# EAGLE board PygmyWEB_Performance_V1p5 (EAGLE 5.11)
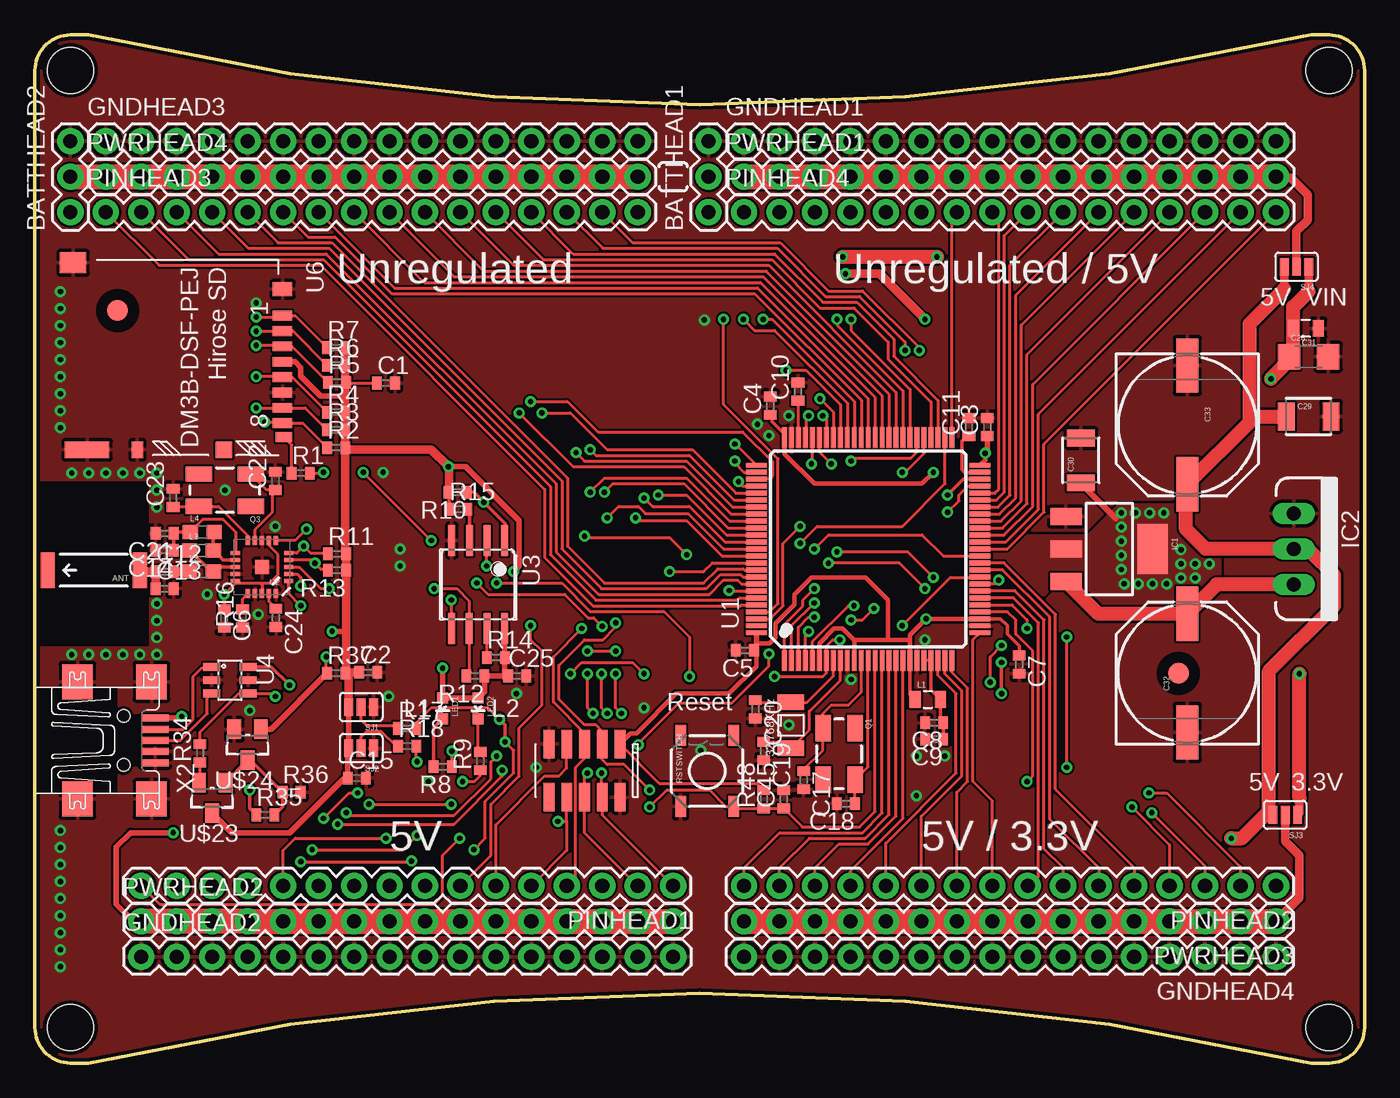
[diagram p0: board, top side]
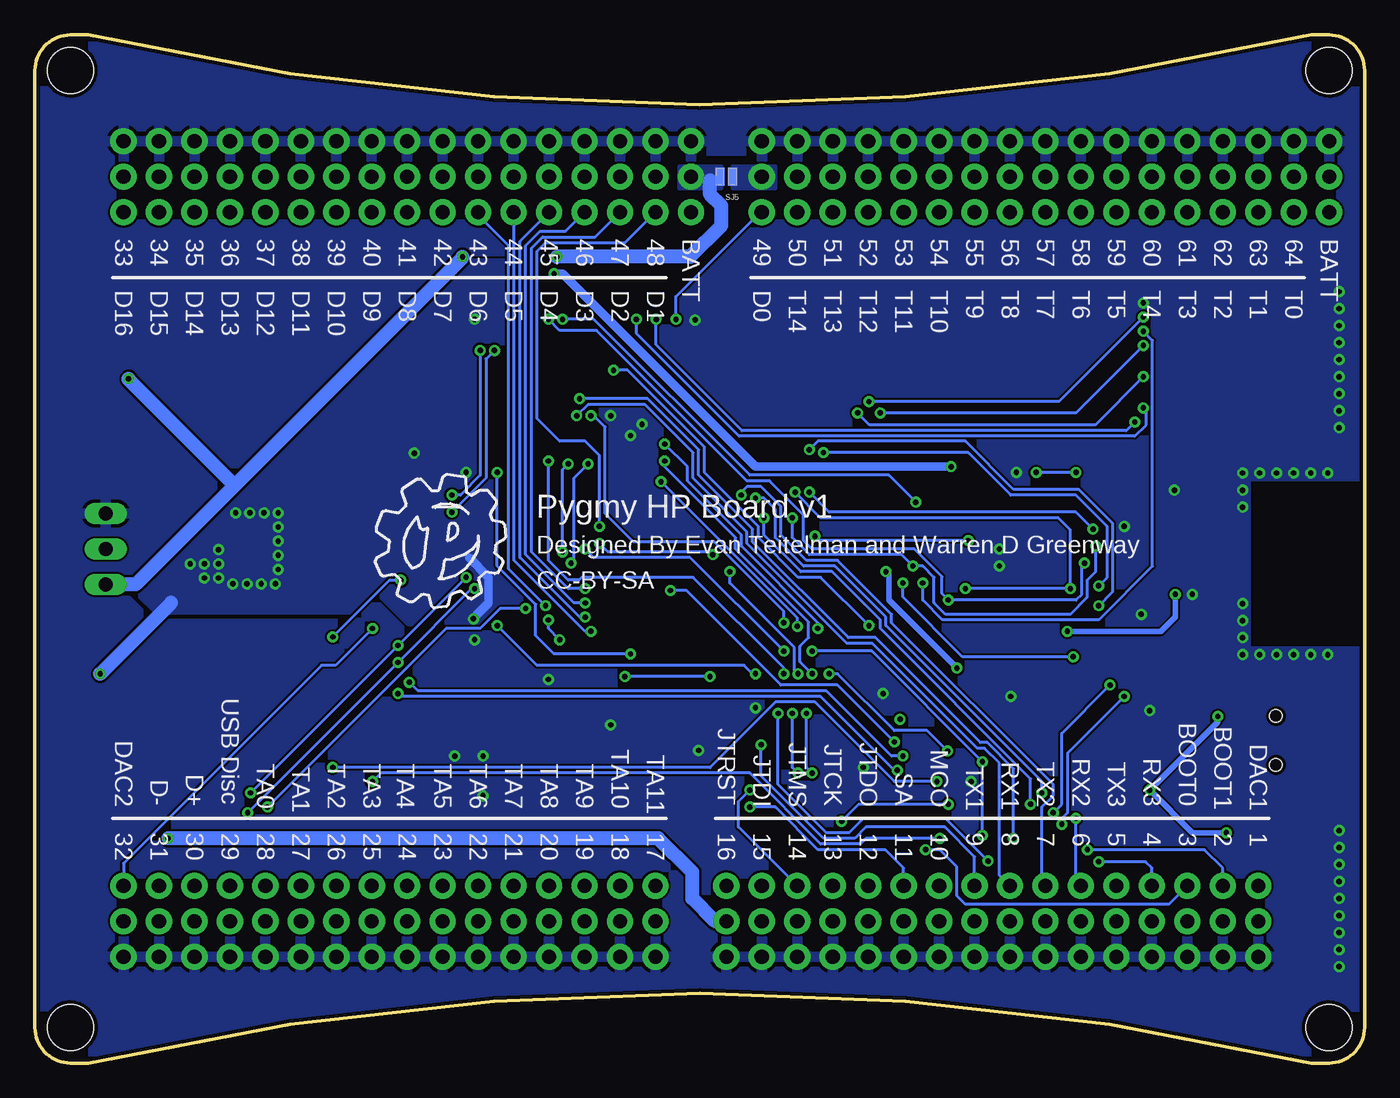
[diagram p1: board, bottom side, seen from below]

Size 95.25 x 73.66 mm. Coordinates in mm from the lower left corner, seen from the top.
Outline: 3.81,73.66 arc26 91.44,73.66 92.71,73.66 arc-90 95.25,71.12 95.25,2.54 arc-90 92.71,0 91.44,0 arc26 3.81,0 2.54,0 arc-90 0,2.54 0,71.12 arc-90 2.54,73.66 3.81,73.66
Copper layers (1*16): Top 0.035mm / dielectric 1.5mm / Bottom 0.035mm
Design rules "Laen (Production) *": minimum track width 6mil, minimum drill 15mil, track to track 6mil, track to pad 6mil, pad to pad 6mil, via to via 6mil, smd to smd 6mil, copper to edge 10mil, drill to drill 6mil, minimum pad ring 10mil, minimum via ring 8mil, stop-mask expansion 4mil, vias tented up to drill 40mil, thermal gap 10mil
tRestrict: area 4.5,52.5 to 7.3,55.3; area 80.5,26.5 to 83.3,29.3; 12 lines
bRestrict: 8 lines

## Footprints (pad centres in the part's own frame; a part is rotated, then mirrored left to right if it is on the bottom)
ANTENNA-CHIP5 = smd 1.016 x 2.54: FEED -3.302,0; NC 3.302,0
1X03 = drill 1.016 pad 1.88 round: 1 0,0; 2 2.54,0; 3 5.08,0
C0402 = smd 0.7 x 0.9: 1 -0.65,0; 2 0.65,0
1206 = smd 1.6 x 1.8: 1 -1.4,0; 2 1.4,0
1210 = smd 1.2 x 2: 1 -1.6,0; 2 1.6,0
0805 = smd 0.8 x 1.2: 1 -0.9,0; 2 0.9,0
PANASONIC_G = smd 3.9 x 1.6: + 4.25,0; - -4.25,0
1X16 = drill 1.016 pad 1.88 round: 1 0,0; 2 2.54,0; 3 5.08,0; 4 7.62,0; 5 10.16,0; 6 12.7,0; 7 15.24,0; 8 17.78,0; 9 20.32,0; 10 22.86,0; 11 25.4,0; 12 27.94,0; 13 30.48,0; 14 33.02,0; 15 35.56,0; 16 38.1,0
SOT223 = smd 1.219 x 2.235: 1 -2.311,-3.099; 2 0,-3.099; 3 2.311,-3.099 | smd 3.6 x 2.2: 4 0,3.099
TO220V = drill 1.016 long: 1 -2.54,0; 2 0,0; 3 2.54,0
FIDUCIAL-1.5X3 = smd 1.5 x 1.5: 1 0,0
0603 = smd 1.1 x 1: 1 -0.85,0; 2 0.85,0
LED-0603 = smd 0.8 x 0.8: A 0,-0.75; C 0,0.75
CRYSTAL-SMD-5X3 = smd 1.9 x 1.1: 1 -1.85,-1.15; 2 1.85,-1.15; 3 1.85,1.15; 4 -1.85,1.15
CM415 = smd 1.1 x 1.9: P$1 0,0; P$2 3.3,0
R0402 = smd 0.7 x 0.9: 1 -0.65,0; 2 0.65,0
TACTILE_SWITCH_SMD = smd 1.524 x 0.762: 1 -2.54,1.905; 2 2.54,1.905; 3 -2.54,-1.905; 4 2.54,-1.905
SJ_3 = smd 0.635 x 1.27: 1 -0.889,0; 2 0,0; 3 0.889,0
SJ_3_PASTE1&2 = smd 0.635 x 1.27: 1 -0.889,0; 2 0,0; 3 0.889,0
SJ_2S-NO = smd 0.635 x 1.27: 1 -0.45,0; 2 0.45,0
TQFP100 = smd 1.5 x 0.35: 1 -8,6; 2 -8,5.5; 3 -8,5; 4 -8,4.5; 5 -8,4; 6 -8,3.5; 7 -8,3; 8 -8,2.5; 9 -8,2; 10 -8,1.5; 11 -8,1; 12 -8,0.5; 13 -8,0; 14 -8,-0.5; 15 -8,-1; 16 -8,-1.5; 17 -8,-2; 18 -8,-2.5; 19 -8,-3; 20 -8,-3.5; 21 -8,-4; 22 -8,-4.5; 23 -8,-5; 24 -8,-5.5; 25 -8,-6; 51 8,-6; 52 8,-5.5; 53 8,-5; 54 8,-4.5; 55 8,-4; 56 8,-3.5; 57 8,-3; 58 8,-2.5; 59 8,-2; 60 8,-1.5; 61 8,-1; 62 8,-0.5; 63 8,0; 64 8,0.5; 65 8,1; 66 8,1.5; 67 8,2; 68 8,2.5; 69 8,3; 70 8,3.5; 71 8,4; 72 8,4.5; 73 8,5; 74 8,5.5; 75 8,6 | smd 0.35 x 1.5: 26 -6,-8; 27 -5.5,-8; 28 -5,-8; 29 -4.5,-8; 30 -4,-8; 31 -3.5,-8; 32 -3,-8; 33 -2.5,-8; 34 -2,-8; 35 -1.5,-8; 36 -1,-8; 37 -0.5,-8; 38 0,-8; 39 0.5,-8; 40 1,-8; 41 1.5,-8; 42 2,-8; 43 2.5,-8; 44 3,-8; 45 3.5,-8; 46 4,-8; 47 4.5,-8; 48 5,-8; 49 5.5,-8; 50 6,-8; 76 6,8; 77 5.5,8; 78 5,8; 79 4.5,8; 80 4,8; 81 3.5,8; 82 3,8; 83 2.5,8; 84 2,8; 85 1.5,8; 86 1,8; 87 0.5,8; 88 0,8; 89 -0.5,8; 90 -1,8; 91 -1.5,8; 92 -2,8; 93 -2.5,8; 94 -3,8; 95 -3.5,8; 96 -4,8; 97 -4.5,8; 98 -5,8; 99 -5.5,8; 100 -6,8
QFN20 = smd 1 x 1: 0 0,0 | smd 0.65 x 0.3: 1 -1.9,1; 2 -1.9,0.5; 3 -1.9,0; 4 -1.9,-0.5; 5 -1.9,-1; 11 1.9,-1; 12 1.9,-0.5; 13 1.9,0; 14 1.9,0.5; 15 1.9,1 | smd 0.3 x 0.65: 6 -1,-1.9; 7 -0.5,-1.9; 8 0,-1.9; 9 0.5,-1.9; 10 1,-1.9; 16 1,1.9; 17 0.5,1.9; 18 0,1.9; 19 -0.5,1.9; 20 -1,1.9
DUBLIB_SOIC8 = smd 0.5 x 2.2: 1 -1.905,-3.154; 2 -0.645,-3.154; 3 0.625,-3.154; 4 1.895,-3.154; 5 1.905,3.154; 6 0.635,3.154; 7 -0.635,3.154; 8 -1.905,3.154
SOT23-6L = smd 0.55 x 1.2: 1 -0.95,-1.3; 2 0,-1.3; 3 0.95,-1.3; 4 0.95,1.3; 5 0,1.3; 6 -0.95,1.3
STM32-JTAG-10P = smd 0.762 x 2.032: P$1 0,0; P$2 0,3.81; P$3 1.27,0; P$4 1.27,3.81; P$5 2.54,0; P$6 2.54,3.81; P$7 3.81,0; P$8 3.81,3.81; P$9 5.08,0; P$10 5.08,3.81
HIROSE-SDCARD-DM3B-DSF-PEJ = smd 0.7 x 1.4: P$1 0,-0.7; P$2 1.1,-0.7; P$3 2.2,-0.7; P$4 3.3,-0.7; P$5 4.4,-0.7; P$6 5.5,-0.7; P$7 6.6,-0.7; P$8 7.7,-0.7 | smd 0.7 x 1.2: P$9 8.7,-0.6 | smd 1.2 x 1.2: P$10 9.6,-4.9 | smd 1.2 x 0.8: P$11 9.6,-11.1 | smd 1.2 x 3.2: P$12 9.6,-14.7 | smd 1.5 x 1.9: P$13 -3.8,-15.7 | smd 1 x 1.4: P$14 -1.9,-0.7
STAND-OFF = hole 3.302: 0,0
SOT23@1 = smd 1 x 1.4: 1 -0.95,-1.1; 2 0.95,-1.1; 3 0,1.1
DUBLIB_UX60-MB-5ST = smd 2 x 0.5: 1 2.25,1.6; 2 2.25,0.8; 3 2.25,0; 4 2.25,-0.8; 5 2.25,-1.6 | smd 2.2 x 2.5: M1 -3.3,-4.2; M2 -3.3,4.2; M3 2,4.2; M4 2,-4.2 | hole 0.9: 0,-1.75; 0,1.75

## Placement (x,y rotation side)
ANT  ANTENNA2SMD5  [ANTENNA-CHIP5]  4.22,35.31 180 top
BATTHEAD1  [1X03]  48.26,60.96 90 top
BATTHEAD2  [1X03]  2.54,60.96 90 top
C1  0.1uF  [C0402]  25.15,48.72 0 top
C2  0.1uF  [C0402]  23.88,27.99 0 top
C3  0.1uF  [C0402]  68.22,45.57 90 top
C4  0.1uF  [C0402]  52.68,47.09 90 top
C5  0.1uF  [C0402]  50.85,29.57 180 top
C6  0.1uF  [C0402]  13.56,31.85 270 top
C7  0.1uF  [C0402]  70.51,28.55 270 top
C8  220pF  [C0402]  64.41,24.38 180 top
C9  0.1uF  [C0402]  64.41,23.22 180 top
C10  2.2uF  [C0402]  54.66,48.11 90 top
C11  2.2uF  [C0402]  66.9,45.57 90 top
C12  1.5pF  [C0402]  9.3,35.2 0 top
C13  1pF  [C0402]  9.3,33.99 0 top
C14  4.7pF  [C0402]  9.3,36.73 180 top
C15  0.1uF  [C0402]  23.06,20.42 0 top
C17  12.5pF  [C0402]  55.07,20.27 270 top
C18  12.5pF  [C0402]  58.09,18.59 180 top
C19  18pF  [C0402]  52.22,22.35 270 top
C20  18pF  [C0402]  51.61,25.35 270 top
C21  0.0022uF  [C0402]  9.3,37.95 180 top
C22  12.5pF  [C0402]  17.22,41.71 90 top
C23  12.5pF  [C0402]  9.91,40.49 90 top
C24  0.033uF  [C0402]  17.27,31.9 270 top
C25  0.1uF  [C0402]  34.54,27.74 0 top
C28  47uF  [1206]  91.24,50.6 0 top
C29  100uF  [1210]  91.24,46.33 0 top
C30  100uF  [1210]  74.93,43.18 90 top
C31  10uF  [0805]  91.03,52.63 180 top
C32  680uF  [PANASONIC_G]  82.55,27.94 90 top
C33  1000uF  [PANASONIC_G]  82.55,45.72 270 top
C45  220pF  [C0402]  53.64,18.9 90 top
CC1  Evan Teitelman  [CC-BY-SA]  -5.08,-12.7 0 top  (outside the outline)
GNDHEAD1  M16PTH  [1X16]  50.8,66.04 0 top
GNDHEAD2  M16PTH  [1X16]  7.62,7.62 0 top
GNDHEAD3  M16PTH  [1X16]  5.08,66.04 0 top
GNDHEAD4  M16PTH  [1X16]  88.9,7.62 180 top
IC1  3.3v  [SOT223]  76.96,36.83 270 top
IC2  AP1084T50L-UTO220  [TO220V]  90.17,36.83 270 top
JP1  FIDUCIAL1.5X3  [FIDUCIAL-1.5X3]  5.92,53.92 0 top
JP2  FIDUCIAL1.5X3  [FIDUCIAL-1.5X3]  81.92,27.92 0 top
L1  10uH  [0805]  63.96,26.06 0 top
L2  3.9nH  [0603]  11.94,35.2 0 top
L3  8.2nH  [0603]  11.94,36.73 0 top
L4  2.7nH  [0603]  11.99,38.05 0 top
LED1  [LED-0603]  29.21,25.4 180 top
LED2  [LED-0603]  31.75,25.4 180 top
PINHEAD1  M16PTH  [1X16]  45.72,12.7 180 top
PINHEAD2  M16PTH  [1X16]  88.9,12.7 180 top
PINHEAD3  M16PTH  [1X16]  5.08,60.96 0 top
PINHEAD4  M16PTH  [1X16]  50.8,60.96 0 top
PWRHEAD1  M16PTH  [1X16]  50.8,63.5 0 top
PWRHEAD2  M16PTH  [1X16]  7.62,10.16 0 top
PWRHEAD3  M16PTH  [1X16]  88.9,10.16 180 top
PWRHEAD4  M16PTH  [1X16]  5.08,63.5 0 top
Q1  8MHz  [CRYSTAL-SMD-5X3]  57.61,22.15 270 top
Q2  CM415  [CM415]  54.15,22.56 90 top
Q3  16MHz  [CRYSTAL-SMD-5X3]  13.61,41.05 180 top
R1  10K  [R0402]  19.05,42.27 0 top
R2  47K  [R0402]  21.59,44.09 0 top
R3  47K  [R0402]  21.59,45.36 0 top
R4  47K  [R0402]  21.59,46.63 0 top
R5  47K  [R0402]  21.64,48.77 0 top
R6  47K  [R0402]  21.59,49.99 0 top
R7  47K  [R0402]  21.59,51.26 0 top
R8  330  [R0402]  29.21,21.23 180 top
R9  330  [R0402]  31.9,21.64 90 top
R10  47K  [R0402]  30.28,40.89 180 top
R11  47K  [R0402]  21.64,36.47 0 top
R12  47K  [R0402]  31.55,27.74 180 top
R13  47K  [R0402]  21.64,35.31 180 top
R14  47K  [R0402]  33.02,29.06 0 top
R15  47K  [R0402]  30.33,39.67 0 top
R16  22K  [R0402]  14.88,31.85 90 top
R17  47K  [R0402]  26.67,23.98 0 top
R18  47K  [R0402]  26.67,22.71 0 top
R34  1.5K  [R0402]  11.84,22.2 90 top
R35  10K  [R0402]  16.51,17.78 0 top
R36  36K  [R0402]  18.39,19.41 0 top
R37  47K  [R0402]  21.59,27.94 0 top
R48  100K  [R0402]  52.22,18.9 90 top
RSTSWITCH  SWITCH-MOMENTARY-2SMD  [TACTILE_SWITCH_SMD]  48.16,20.93 90 top
SJ1  [SJ_3]  23.37,25.5 180 top
SJ2  [SJ_3]  23.37,22.56 180 top
SJ3  [SJ_3_PASTE1&2]  89.56,17.78 180 top
SJ4  [SJ_3_PASTE1&2]  90.37,57.05 180 top
SJ5  SOLDERJUMPERNO  [SJ_2S-NO]  45.72,63.5 180 bottom
U1  STM32F205VG  [TQFP100]  59.69,36.83 90 top
U2  NRF24L01SMD  [QFN20]  16.26,35.53 180 top
U3  SST25VF080B  [DUBLIB_SOIC8]  31.75,34.29 180 top
U4  USBLC6-2  [SOT23-6L]  13.97,27.43 270 top
U5  STM32-JTAG-10P  [STM32-JTAG-10P]  41.91,22.86 180 top
U6  HIROSE-SDCARD-DM3B-DSF-PEJ  [HIROSE-SDCARD-DM3B-DSF-PEJ]  18.44,53.54 270 top
U$10  [STAND-OFF]  2.54,2.54 180 top
U$11  [STAND-OFF]  92.71,2.54 180 top
U$15  [STAND-OFF]  92.71,71.12 0 top
U$16  [STAND-OFF]  2.54,71.12 0 top
U$23  PMBT6428  [SOT23@1]  12.7,19 180 top
U$24  PMBT6428  [SOT23@1]  15.24,22.81 180 top
X2  MINI-USBUX60-MB-5ST  [DUBLIB_UX60-MB-5ST]  6.35,23.11 0 top

## Library data of the parts
ANT GNDHEAD1-GNDHEAD4 L2-L4 LED1 LED2 PINHEAD1-PINHEAD4 PWRHEAD1-PWRHEAD4 Q1-Q3 SJ1-SJ5 U1-U6 X2 = Pygmy
BATTHEAD1 BATTHEAD2 C28-C33 JP1 JP2 L1 RSTSWITCH U$10 U$11 U$15 U$16 = SparkFun
C1-C15 C17-C25 C45 R1-R18 R34-R37 R48 = rcl
CC1 IC1 IC2 = Custom12
U$23 U$24 = dublib

## Nets
3.3V: C1.1 C2.1 C3.1 C4.1 C5.1 C6.1 C7.1 C15.1 C25.1 C30.1 IC1.2 IC1.4 L1.1 LED1.A LED2.A R2.2 R3.2 R4.2 R5.2 R6.2 R7.2 R10.2 R11.2 R12.1 R13.1 R14.2 R15.1 R37.2 R48.2 SJ1.3 SJ2.3 SJ3.1 U1.6 U1.11 U1.19 U1.28 U1.50 U1.75 U1.100 U2.7 U2.15 U2.18 U3.8 U5.P$1 U6.P$4 U$23.3
5V: C29.1 C33.+ IC2.2 PWRHEAD2.1 PWRHEAD2.2 PWRHEAD2.3 PWRHEAD2.4 PWRHEAD2.5 PWRHEAD2.6 PWRHEAD2.7 PWRHEAD2.8 PWRHEAD2.9 PWRHEAD2.10 PWRHEAD2.11 PWRHEAD2.12 PWRHEAD2.13 PWRHEAD2.14 PWRHEAD2.15 PWRHEAD2.16 R35.1 SJ3.3 SJ4.3 X2.1
BOOT0: PINHEAD1.14 R17.2 U1.94
BOOT1: PINHEAD1.15 R18.2 U1.37
COM1_RX: PINHEAD1.9 U1.69
COM1_TX: PINHEAD1.8 U1.55
COM2_RX: PINHEAD1.11 U1.87
COM2_TX: PINHEAD1.10 U1.86
COM3_RX: PINHEAD1.13 U1.56
COM3_TX: PINHEAD1.12 U1.68
D0: PINHEAD3.16 U1.97
D1: PINHEAD4.1 U1.98
D2: PINHEAD4.2 U1.1
D3: PINHEAD4.3 U1.2
D4: PINHEAD4.4 U1.3
D5: PINHEAD4.5 U1.4
D6: PINHEAD4.6 U1.5
D7: PINHEAD4.7 U1.51
D8: PINHEAD4.8 U1.46
D9: PINHEAD4.9 U1.45
D10: PINHEAD4.10 U1.44
D11: PINHEAD4.11 U1.43
D12: PINHEAD4.12 U1.42
D13: PINHEAD4.13 U1.41
D14: PINHEAD4.14 U1.40
D15: PINHEAD4.15 U1.39
D16: PINHEAD4.16 U1.38
DAC1: PINHEAD1.16 U1.29
DAC2: PINHEAD2.1 U1.30
FLASH_CS: R10.1 U1.58 U3.1
GND: BATTHEAD1.3 BATTHEAD2.3 C1.2 C2.2 C3.2 C4.2 C5.2 C6.2 C7.2 C8.2 C9.2 C10.2 C11.2 C13.2 C14.2 C15.2 C17.2 C18.2 C19.2 C20.2 C21.2 C22.2 C23.2 C24.2 C25.2 C28.2 C29.2 C30.2 C31.1 C32.- C33.- C45.2 GNDHEAD1.1 GNDHEAD1.2 GNDHEAD1.3 GNDHEAD1.4 GNDHEAD1.5 GNDHEAD1.6 GNDHEAD1.7 GNDHEAD1.8 GNDHEAD1.9 GNDHEAD1.10 GNDHEAD1.11 GNDHEAD1.12 GNDHEAD1.13 GNDHEAD1.14 GNDHEAD1.15 GNDHEAD1.16 GNDHEAD2.1 GNDHEAD2.2 GNDHEAD2.3 GNDHEAD2.4 GNDHEAD2.5 GNDHEAD2.6 GNDHEAD2.7 GNDHEAD2.8 GNDHEAD2.9 GNDHEAD2.10 GNDHEAD2.11 GNDHEAD2.12 GNDHEAD2.13 GNDHEAD2.14 GNDHEAD2.15 GNDHEAD2.16 GNDHEAD3.1 GNDHEAD3.2 GNDHEAD3.3 GNDHEAD3.4 GNDHEAD3.5 GNDHEAD3.6 GNDHEAD3.7 GNDHEAD3.8 GNDHEAD3.9 GNDHEAD3.10 GNDHEAD3.11 GNDHEAD3.12 GNDHEAD3.13 GNDHEAD3.14 GNDHEAD3.15 GNDHEAD3.16 GNDHEAD4.1 GNDHEAD4.2 GNDHEAD4.3 GNDHEAD4.4 GNDHEAD4.5 GNDHEAD4.6 GNDHEAD4.7 GNDHEAD4.8 GNDHEAD4.9 GNDHEAD4.10 GNDHEAD4.11 GNDHEAD4.12 GNDHEAD4.13 GNDHEAD4.14 GNDHEAD4.15 GNDHEAD4.16 IC1.1 IC2.1 R16.1 R36.2 RSTSWITCH.1 SJ1.1 SJ2.1 U1.10 U1.20 U1.27 U1.74 U2.0 U2.8 U2.14 U2.17 U2.20 U3.4 U4.2 U4.5 U5.P$2 U5.P$9 U6.P$6 U6.P$11 U6.P$12 U6.P$13 U6.P$14 U$24.2 X2.4 X2.5 X2.M1 X2.M2 X2.M3 X2.M4
JTCK: PINHEAD1.4 U1.76 U5.P$5
JTDI: PINHEAD1.2 U1.77 U5.P$6
JTDO: PINHEAD1.5 U1.89 U5.P$8
JTMS: PINHEAD1.3 U1.72 U5.P$3
JTRST: PINHEAD1.1 U1.90 U5.P$4
LED0: R8.1 U1.34
LED1: R9.1 U1.33
MCO: PINHEAD1.7 U1.67
N$1: C17.1 Q1.1 U1.12
N$2: C8.1 C9.1 L1.2 U1.21 U1.22
N$3: C18.1 Q1.3 U1.13
N$4: R35.2 R36.1 U$23.1 U$24.3
N$6: C11.1 U1.49
N$7: C10.1 U1.73
N$8: C20.1 Q2.P$2 U1.8
N$9: C19.1 Q2.P$1 U1.9
N$10: LED1.C R8.2
N$11: R1.1 U6.P$9
N$12: LED2.C R9.2
N$17: C12.2 L2.1
N$18: L3.2 L4.2 U2.12
N$19: ANT.FEED C12.1 C13.1
N$20: L2.2 L3.1 U2.13
N$21: C14.1 C21.1 L4.1 U2.11
N$23: R16.2 U2.16
N$24: C24.1 U2.19
N$25: R34.1 U$23.2
N$26: C22.1 Q3.1 U2.9
N$27: C23.1 Q3.3 U2.10
N$28: R15.2 U3.3
N$29: R14.1 U3.7
N$30: R17.1 SJ1.2
N$31: R18.1 SJ2.2
N$38: U4.1 X2.2
PH1LINE: PWRHEAD1.1 PWRHEAD1.2 PWRHEAD1.3 PWRHEAD1.4 PWRHEAD1.5 PWRHEAD1.6 PWRHEAD1.7 PWRHEAD1.8 PWRHEAD1.9 PWRHEAD1.10 PWRHEAD1.11 PWRHEAD1.12 PWRHEAD1.13 PWRHEAD1.14 PWRHEAD1.15 PWRHEAD1.16 SJ4.2
PH3LINE: PWRHEAD3.1 PWRHEAD3.2 PWRHEAD3.3 PWRHEAD3.4 PWRHEAD3.5 PWRHEAD3.6 PWRHEAD3.7 PWRHEAD3.8 PWRHEAD3.9 PWRHEAD3.10 PWRHEAD3.11 PWRHEAD3.12 PWRHEAD3.13 PWRHEAD3.14 PWRHEAD3.15 PWRHEAD3.16 SJ3.2
PH4LINE: BATTHEAD2.2 PWRHEAD4.1 PWRHEAD4.2 PWRHEAD4.3 PWRHEAD4.4 PWRHEAD4.5 PWRHEAD4.6 PWRHEAD4.7 PWRHEAD4.8 PWRHEAD4.9 PWRHEAD4.10 PWRHEAD4.11 PWRHEAD4.12 PWRHEAD4.13 PWRHEAD4.14 PWRHEAD4.15 PWRHEAD4.16 SJ5.1
RF24_CE: U1.81 U2.1
RF24_CS: U1.82 U2.2
RF24_IRQ: U1.84 U2.6
SA: C45.1 PINHEAD1.6 R48.1 RSTSWITCH.3 U1.14 U5.P$7
SDIO_CK: R4.1 U1.80 U6.P$5
SDIO_CMD: R5.1 U1.83 U6.P$3
SDIO_D0: R3.1 U1.65 U6.P$7
SDIO_D1: R2.1 U1.66 U6.P$8
SDIO_D2: R7.1 U1.78 U6.P$1
SDIO_D3: R6.1 U1.79 U6.P$2
SDIO_DETECT: R1.2 U1.52
SPI_MISO: R11.1 U1.88 U2.5 U3.2
SPI_MOSI: R13.2 U1.57 U2.4 U3.5
SPI_SCK: R12.2 U1.85 U2.3 U3.6
T0: PINHEAD3.1 U1.96
T1: PINHEAD3.2 U1.95
T2: PINHEAD3.3 U1.93
T3: PINHEAD3.4 U1.92
T4: PINHEAD3.5 U1.91
T5: PINHEAD3.6 U1.64
T6: PINHEAD3.7 U1.63
T7: PINHEAD3.8 U1.62
T8: PINHEAD3.9 U1.61
T9: PINHEAD3.10 U1.60
T10: PINHEAD3.11 U1.59
T11: PINHEAD3.12 U1.54
T12: PINHEAD3.13 U1.53
T13: PINHEAD3.14 U1.47
T14: PINHEAD3.15 U1.48
TA0: PINHEAD2.5 U1.36
TA1: PINHEAD2.6 U1.35
TA2: PINHEAD2.7 U1.32
TA3: PINHEAD2.8 U1.31
TA4: PINHEAD2.9 U1.26
TA5: PINHEAD2.10 U1.25
TA6: PINHEAD2.11 U1.24
TA7: PINHEAD2.12 U1.23
TA8: PINHEAD2.13 U1.18
TA9: PINHEAD2.14 U1.17
TA10: PINHEAD2.15 U1.16
TA11: PINHEAD2.16 U1.15
USB_DISC: PINHEAD2.4 R37.1 U1.7 U$24.1
USB_DM: PINHEAD2.2 U1.70 U4.6
USB_DP: PINHEAD2.3 R34.2 U1.71 U4.4
USBP3: U4.3 X2.3
V+: BATTHEAD1.2 C28.1 C31.2 C32.+ IC1.3 IC2.3 SJ4.1 SJ5.2

## Tracks (layer width: path | path; a pad name or v marks a point on that pad's centre or on a via)
3.3V  (via drill 0.38)
  Top 0.203: 58.67,30.33 58.69,30.31 | C6.1 v13.56,33.58 14.38,34.39 | U2.7 16.77,37.08 17.42,36.42 17.42,35 16.81,34.39 16.41,34.39 | U2.18 16.27,34.25 16.41,34.39 | U5.P$1 44.71,20.06 51.71,20.06 R48.2 | C1.1 22.34,48.72 R5.2 | R11.2 22.34,36.42 | C5.1 51.5,29.94 51.69,30.12 | R14.2 33.67,29.09 33.66,29.11 | 29.68,40.89 R10.2 | 22.3,43.94 22.3,44.03 R2.2 | 14.38,34.39 16.41,34.39 | 14.38,34.39 14.38,34.52 U2.15
  Top 0.254: U1.75 53.69,45.07 52.78,45.97 52.78,46.54 C4.1 | U1.19 62.69,26.43 L1.1 | 29.68,40.84 R15.1 | C7.1 70.51,29.87 69.65,30.73 69.65,31.34 69.16,31.83 U1.28
  Top 0.305: IC1.2 73.71,36.83
  Top 0.33: 62.69,30.33 62.69,30.69 v63.83,31.83 U1.28 | 62.69,30.33 U1.19 | U1.75 53.69,43.64 55.83,41.5 63.55,41.5 v64.36,42.32 | 51.69,29.92 51.69,28.42 49.73,26.47 45.92,26.47 43.08,23.62 42.67,23.62 U5.P$1 | 51.69,30.12 51.69,30.1 51.72,30.07 52.63,30.07 53.04,30.48 53.04,31.5 54.41,32.87 54.41,33.58 55.63,34.8 59.49,34.8 61.11,33.17 61.11,30.33 | 51.69,30.61 U1.100 | 58.69,30.31 U1.11 | U1.6 56.19,30.08 57.25,31.14 57.86,31.14 58.67,30.33 61.11,30.33 | 61.11,30.33 62.69,30.33 | U1.50 68.07,43.21 v68.07,43.69
  Top 0.406: U$23.3 14.09,16.51 18.24,16.51 22.1,20.37 22.36,20.37 C15.1 22.41,22.49 SJ2.3 SJ1.3 | v29.62,42.72 29.68,42.72 30.84,42.72 34.7,38.86 34.7,35.61 v34.29,35.2 | 33.66,31.93 U3.8 33.66,29.11 33.66,27.71 33.63,27.74 R12.1 32.2,26.6 LED2.A LED1.A v29.21,28.3 | 22.29,30.94 v21.28,30.94 | U6.P$4 18.64,50.24 19.05,49.84 19.05,49.23 20.47,47.8 22.24,47.8 | 51.69,29.92 51.69,30.1 51.69,30.61 | C30.1 74.93,41.5 77.42,39.01 | v68.07,43.69 68.22,43.84 C3.1
  Top 0.61: v58.06,56.54 60.5,56.54 v63.75,53.29 | 33.63,27.74 C25.1 | R10.2 29.63,41.11 | 22.29,27.99 22.29,30.94 R13.1 R11.2 22.24,36.52 R2.2 R3.2 R4.2 22.24,47.8 R6.2 | R6.2 R7.2 | R6.2 22.24,48.82 R5.2 | 29.68,40.84 29.68,40.89 29.68,42.72 29.68,42.78 | v29.62,42.72 28.4,43.94 22.3,43.94 | 22.29,27.99 C2.1 | 22.29,27.99 R37.2 22.48,27.7 SJ1.3 | SJ3.1 90.58,17.91 90.58,19
  Top 1.016: 90.58,19 v90.58,27.89
  Bottom 0.406: v34.29,35.2 34.09,35 34.09,33.17 v29.21,28.3 | v13.56,33.58 13.56,31.95 14.58,30.94 v21.28,30.94
  Bottom 0.61: v63.83,31.83 63.83,31.87 62.74,32.97 62.74,34.8 64.16,36.22 | v29.62,42.72 43.64,42.72 57.45,56.54 v58.06,56.54
  Bottom 1.016: v90.58,27.89 85.5,32.97
  other vias: 77.83,37.39 77.83,36.37 77.83,38.4 77.83,39.42 77.83,35.36 78.84,39.42 80.87,39.42 79.86,39.42 78.03,34.34 80.06,34.34 81.08,34.34 82.09,36.78 82.09,35.76 83.11,35.76 84.12,35.76 82.09,34.75 83.11,34.75 79.04,34.34
  pour Bottom: 71.93,33.12 72.75,32.31 86.56,32.31 87.99,33.73 68.48,52.83 64.01,57.51 61.57,57.51 61.77,43.28 61.77,34.75 59.74,32.72 59.74,31.5 68.48,31.5 70.92,33.93
  pour Top (no thermals): 81.69,40.03 77.62,40.03 75.39,37.8 68.68,37.8 68.68,33.53 72.34,33.53 72.95,34.14 74.98,34.14 76.4,32.72 81.69,32.72 81.69,33.73 83.92,33.73 84.94,34.75 84.94,36.37 83.52,36.37 81.89,38 81.89,39.83
5V  (via drill 0.38)
  Top 0.254: R35.1 15.39,18.25 v15.39,19.56
  Top 0.406: 7.06,10.16 5.84,11.38 5.84,15.49 6.86,16.51 v9.91,16.51 | X2.1 10.39,24.71 v10.52,24.84
  Top 0.61: 91.39,36.63 90.37,36.63 IC2.2 | 82.45,40.1 82.45,41.37 C33.+ | 88.39,18.03 88.49,18.03 88.67,17.86 SJ3.3 | 89.48,55.45 SJ4.3
  Top 0.62: 7.06,10.16 PWRHEAD2.4
  Top 1.016: IC2.2 83.87,36.83 82.45,38.25 82.45,40.1 | C33.+ 87.01,45.93 | 91.39,36.63 93.07,34.95 93.07,32.77 88.39,28.09 88.39,18.03 86.46,16.1 v85.7,16.1 | 89.48,55.45 87.01,52.97 87.01,45.93 | 87.01,45.93 87.41,46.33 C29.1
  Top 1.778: PWRHEAD2.16 PWRHEAD2.15 PWRHEAD2.14 PWRHEAD2.13 PWRHEAD2.12 PWRHEAD2.11 PWRHEAD2.10 PWRHEAD2.9 PWRHEAD2.8 PWRHEAD2.7 PWRHEAD2.6 PWRHEAD2.5 PWRHEAD2.4 PWRHEAD2.3 PWRHEAD2.2 PWRHEAD2.1
  Bottom 0.406: v10.52,24.84 10.52,24.44 v15.39,19.56 12.34,16.51 v9.91,16.51
  Bottom 1.016: v85.7,16.1 50.6,16.1 48.16,13.67 48.16,11.79 46.53,10.16 PWRHEAD2.16
BOOT0  (via drill 0.38)
  Top 0.203: U1.94 49.78,33.83 49.75,33.86 v49.73,33.86 | v33.27,24.64 32.46,25.45 28.39,25.45 27.32,24.38 R17.2 | v33.68,23.01 34.29,22.4 34.29,20.78 32.26,18.74 32.26,16.1 v31.45,15.29
  Top 0.254: v33.68,23.01 33.68,24.23 v33.27,24.64
  Bottom 0.203: PINHEAD1.14 14.02,11.38 28.6,11.38 29.21,11.99 29.21,14.07 30.43,15.29 v31.45,15.29 | v33.68,23.01 37.74,27.08 41.81,27.08 48.59,33.86 v49.73,33.86
BOOT1  (via drill 0.38)
  Top 0.203: U1.37 65.07,36.33 63.55,37.85 56.84,37.85 v55.83,36.83 | v39.57,29.52 v41.61,29.52 | v19.86,15.29 26.37,15.29 v27.38,16.31 | v27.38,21.59 27.32,21.65 R18.2
  Bottom 0.203: v41.61,29.52 48.31,36.22 55.22,36.22 v55.83,36.83 | v27.38,16.31 v27.38,21.59 35.31,29.52 v39.57,29.52 | v19.86,15.29 11.48,15.29 10.16,13.97 PINHEAD1.15
COM1_RX  (via drill 0.38)
  Top 0.203: U1.69 56.69,46.13 v56.44,46.38
  Bottom 0.203: PINHEAD1.9 26.16,13.46 26.16,21.49 27.23,22.55 27.74,22.55 35.26,30.07 37.08,30.07 44.25,37.24 44.25,38.05 48.11,41.91 48.11,43.74 51.56,47.19 55.63,47.19 v56.44,46.38
COM1_TX  (via drill 0.38)
  Top 0.203: v62.13,42.32 62.33,42.32 63.69,43.68 U1.55 | v43.23,22.81 43.23,22.91 46.13,25.81 49.94,25.81 52.58,28.45 v52.58,29.31
  Bottom 0.203: v52.58,29.31 58.06,29.31 59.39,30.63 59.39,32.87 62.13,35.61 v62.13,42.32 | v43.23,22.81 43.23,20.57 38.76,16.1 36.52,16.1 35.71,16.92 30.07,16.92 27.94,14.78 PINHEAD1.8 27.94,13.51
COM2_RX  (via drill 0.38)
  Top 0.203: v23.11,19.35 22.5,19.35 v20.68,17.53 | U1.87 49.44,37.33 46.89,39.88 44.25,39.88 v43.64,40.49
  Bottom 0.203: PINHEAD1.11 20.68,13.06 v20.68,17.53 | v43.64,40.49 43.03,40.49 42.22,39.68 42.22,37.64 40.18,35.61 37.95,35.61 34.29,31.95 34.29,31.34 23.11,20.17 v23.11,19.35
COM2_TX  (via drill 0.38)
  Top 0.203: U1.86 49.55,37.83 46.69,40.69 v44.65,40.69
  Bottom 0.203: PINHEAD1.10 22.96,12.8 23.11,12.8 23.11,18.34 22.3,19.15 22.3,19.96 33.88,31.55 33.88,32.16 37.74,36.02 39.98,36.02 41.81,37.85 41.81,39.88 43.23,41.3 44.25,41.3 44.65,40.89 v44.65,40.69
COM3_RX  (via drill 0.38)
  Top 0.203: U1.56 63.19,43.78 62.74,43.33 58.67,43.33 v58.47,43.13 | v41.61,27.89 41.61,25.45 v42.01,25.04 | v26.98,14.48 26.92,14.43 v19.05,14.43
  Bottom 0.203: v58.47,43.13 58.47,36.02 57.05,34.59 56.29,34.59 56.08,34.8 48.11,34.8 41.61,28.3 v41.61,27.89 | v42.01,25.04 42.01,19.96 38.56,16.51 36.93,16.51 35.92,17.53 30.02,17.53 v26.98,14.48 | PINHEAD1.13 15.24,13.97 15.7,14.43 v19.05,14.43
COM3_TX  (via drill 0.38)
  Top 0.203: U1.68 57.19,46.65 v56.24,47.6 | PINHEAD1.12 17.78,13.36 | PINHEAD1.12 17.78,13.56 | PINHEAD1.12 17.78,15.24 18.64,16.1 v25.15,16.1
  Bottom 0.203: v56.24,47.6 51.36,47.6 47.7,43.94 47.7,42.11 43.84,38.25 43.84,37.34 36.98,30.48 35.05,30.48 27.53,22.96 27.03,22.96 25.15,21.08 v25.15,16.1
D0  (via drill 0.38)
  Top 0.203: v49.33,53.29 49.33,47.19 53.24,43.28 53.24,32.92 52.63,32.31 51.71,32.31 U1.97
  Bottom 0.203: v49.33,53.29 49.33,54.91 43.28,60.96 PINHEAD3.16
D1  (via drill 0.38)
  Top 0.203: U1.98 52.66,31.83 53.59,32.77 53.59,37.24 v54.81,38.46
  Bottom 0.203: v54.81,38.46 54.81,43.54 55.83,44.55 57.66,44.55 59.28,46.18 59.28,58.17 58.67,58.78 52.98,58.78 PINHEAD4.1
D2  (via drill 0.38)
  Top 0.203: v55.83,33.98 55.02,33.17 55.02,32.77 53.69,31.44 U1.1
  Bottom 0.203: v55.83,33.98 57.05,33.98 59.69,36.63 59.69,58.37 58.88,59.18 55.12,59.18 PINHEAD4.2
D3  (via drill 0.38)
  Top 0.203: U1.2 54.19,29.7 54.2,29.72 54.2,31.34 v55.83,32.97
  Bottom 0.203: v55.83,32.97 56.64,32.97 60.1,36.42 60.1,58.57 59.08,59.59 57.25,59.59 PINHEAD4.3
D4  (via drill 0.38)
  Top 0.203: U1.3 54.69,31.22 55.42,31.95 v55.83,31.95
  Bottom 0.203: PINHEAD4.4 60.5,58.88 60.5,36.22 56.24,31.95 v55.83,31.95
D5  (via drill 0.38)
  Top 0.203: U1.4 55.19,30.7 v55.42,30.94
  Bottom 0.203: v55.42,30.94 55.83,30.94 60.91,36.02 60.91,60.91
  Bottom 0.254: 60.91,60.91 PINHEAD4.5
D6  (via drill 0.38)
  Top 0.203: U1.5 55.69,30.19 58.27,32.77 v58.67,32.77
  Bottom 0.203: PINHEAD4.6 63.5,60.76 61.32,58.57 61.32,35.41 v58.67,32.77
D7
  Top 0.203: U1.51 65.69,60.61 PINHEAD4.7
D8
  Top 0.203: U1.46 68.77,40.83 69.04,41.1 69.04,60.5 PINHEAD4.8
D9
  Top 0.203: U1.45 68.88,40.33 69.44,40.89 69.44,59.28 PINHEAD4.9
D10
  Top 0.203: U1.44 68.99,39.83 69.85,40.69 69.85,57.15 PINHEAD4.10
D11
  Top 0.203: U1.43 69.1,39.33 70.26,40.49 70.26,55.02 PINHEAD4.11
D12
  Top 0.203: U1.42 69.21,38.83 70.66,40.28 70.66,52.88 PINHEAD4.12
D13
  Top 0.203: U1.41 69.32,38.33 71.07,40.08 71.07,50.75 PINHEAD4.13
D14
  Top 0.203: U1.40 69.43,37.83 71.48,39.88 71.48,48.62 PINHEAD4.14
D15
  Top 0.203: U1.39 69.54,37.33 71.88,39.68 71.88,46.48 PINHEAD4.15
D16
  Top 0.203: U1.38 69.65,36.83 72.29,39.47 72.29,44.35 PINHEAD4.16
DAC1  (via drill 0.38)
  Top 0.203: U1.29 69.68,32.33 70.26,31.75 70.26,30.73 71.48,29.52 71.48,20.57 v71.07,20.17 | v30.43,16.1 29.21,14.88 29.21,11.99 28.6,11.38 8.94,11.38 PINHEAD1.16
  Bottom 0.203: v30.43,16.1 35.71,16.1 36.12,15.7 38.96,15.7 44.04,20.78 70.46,20.78 v71.07,20.17
DAC2  (via drill 0.38)
  Top 0.203: U1.30 69.99,32.83 71.07,31.75 v71.07,31.14
  Bottom 0.203: v71.07,31.14 73.71,28.5 74.73,28.5 88.9,14.33 PINHEAD2.1 88.9,13.06
FLASH_CS  (via drill 0.38)
  Top 0.203: U1.58 62.19,48.15 57.45,52.88 v57.45,53.29
  Top 0.254: R10.1 31.45,40.89 v32.16,40.18 33.68,38.66 33.68,37.47 U3.1
  Bottom 0.203: v57.45,53.29 55.22,53.29 44.04,42.11 34.09,42.11 v32.16,40.18
GND  (via drill 0.38)
  other vias: 43.64,25.45 17.22,38.46 3.86,29.26 63.14,19.15 15.39,25.25 25.35,26.26 34.49,26.47 28.19,20.17 54,46.38 35.92,21.18 24.94,42.32 26.16,36.83 52.58,44.96 8.74,41.05 1.83,54.05 1.83,55.27 1.83,52.83 26.16,35.61 7.52,42.27 5.08,29.26 15.85,54.46 8.74,42.27 8.74,39.83 7.52,29.26 8.74,31.7 6.3,29.26 8.74,30.48 8.74,29.26 5.08,42.27 3.86,42.27 2.64,42.27 6.3,42.27 63.14,22 65.18,22 58.47,27.48 63.75,30.33 1.83,14.22 1.83,11.79 1.83,10.57 1.83,9.35 1.83,8.13 1.83,6.91 12.34,33.58 16,32.16 51.77,45.77 13.61,41.05 1.83,13 1.83,15.44 1.83,16.66 2.64,29.26 1.83,50.39 1.83,51.61 1.83,49.17 1.83,46.74 1.83,47.96 1.83,45.52 8.74,32.92 47.96,53.24 54,24.23 47.7,22.4
  pour Bottom: -5.08,78.74 100.33,78.74 100.53,-4.88 -5.08,-5.08
  pour Top: -2.54,76.2 97.79,76.2 97.79,-2.54 -2.54,-2.54
JTCK  (via drill 0.38)
  Top 0.203: v50.14,44.35 50.17,44.35 U1.76 | 39.37,23.62 37.14,25.86 37.14,29.11 v39.17,31.14 | PINHEAD1.4 38.73,13.33 38.73,21.18 39.37,21.82 U5.P$5
  Top 0.254: U5.P$5 39.37,23.62
  Bottom 0.203: v50.14,44.35 48.51,42.72 48.51,41.71 44.65,37.85 44.65,37.03 39.17,31.55 v39.17,31.14
JTDI  (via drill 0.38)
  Top 0.203: 51.68,42.32 U1.77 51,42.33 | v39.57,27.89 39.57,25.45 v39.98,25.04 | v39.57,20.78 39.37,20.57 U5.P$6 39.37,16.51 PINHEAD1.2 | v50.14,43.13 50.14,42.98 50.8,42.32 50.99,42.32 51,42.33 | 51,42.33 50.97,42.33
  Bottom 0.203: v39.98,25.04 39.98,21.18 v39.57,20.78 | v50.14,43.13 50.14,42.72 45.06,37.64 45.06,36.83 39.83,31.6 39.83,30.48 40.44,29.87 40.44,28.75 v39.57,27.89
JTDO  (via drill 0.38)
  Top 0.203: 38.1,17.32 U5.P$8 | v23.93,18.54 v29.82,18.54 | U1.89 49.22,36.33 46.69,38.86 43.23,38.86 v43.03,39.07 | v37.47,17.32 38.1,17.32 | 38.1,17.32 38.1,15.24 PINHEAD1.5
  Bottom 0.203: v43.03,39.07 43.03,37.85 40.39,35.2 38.15,35.2 34.7,31.75 34.7,31.14 23.93,20.37 v23.93,18.54 | 37.54,17.32 v37.47,17.32 36.25,18.54 v29.82,18.54
JTMS  (via drill 0.38)
  Top 0.203: v44.04,19.56 42.22,21.39 41,21.39 40.64,21.74 U5.P$3 40.64,23.77 40.18,24.23 39.37,24.23 37.54,26.06 37.54,28.5 39.37,30.33 40.69,30.33 41.61,31.24 v41.61,31.55 | 55.22,44.86 55.22,46.18 v55.42,46.38
  Top 0.254: 55.22,44.86 U1.72
  Bottom 0.203: v44.04,19.56 44.86,18.74 44.86,16.92 PINHEAD1.3 | v55.42,46.38 55.22,46.38 54.41,45.57 54.41,39.37 52.38,37.34 46.58,37.34 41.61,32.36 v41.61,31.55
JTRST  (via drill 0.38)
  Top 0.203: U1.90 48.53,35.83 47.9,35.2 v45.47,35.2 | v40.59,27.89 40.59,25.45 v41,25.04 | v40.59,20.78 40.59,19.1 U5.P$4 | 40.64,18.29 40.64,17.78 PINHEAD1.1
  Top 0.254: U5.P$4 40.64,18.29
  Bottom 0.203: v41,25.04 41,21.18 v40.59,20.78 | v45.47,35.2 45.47,34.39 40.84,29.77 40.84,28.14 v40.59,27.89
LED0  (via drill 0.38)
  Top 0.203: 67.66,34.8 65.58,34.8 v62.13,31.34 | v38.35,27.89 39.17,28.7 42.82,28.7 v43.64,27.89 | v29.87,22.35 29.87,21.24 R8.1
  Top 0.254: 67.66,34.8 U1.34
  Bottom 0.203: v62.13,31.34 59.28,28.5 44.45,28.5 43.84,27.89 v43.64,27.89 | v38.35,27.89 37.74,27.89 33.68,23.83 31.34,23.83 v29.87,22.35
LED1  (via drill 0.38)
  Top 0.203: U1.33 68.77,34.33 v69.04,34.59 | v73.91,21.18 v73.91,30.53 | R9.1 31.9,20.58 31.49,20.17 v30.63,20.17
  Bottom 0.203: v73.91,21.18 46.89,21.18 42.22,25.86 39.37,25.86 33.68,20.17 v30.63,20.17 | v69.04,34.59 69.85,34.59 v73.91,30.53
MCO  (via drill 0.38)
  Top 0.203: U1.67 57.69,47.16 55.22,49.63 v53.8,49.63 | v35.51,31.34 35.51,30.33 36.32,29.52 36.32,25.65 34.7,24.03 34.7,20.57 32.66,18.54 32.66,14.88 PINHEAD1.7
  Bottom 0.203: v53.8,49.63 52.78,49.63 47.3,44.15 47.3,42.32 43.43,38.46 43.43,37.64 40.59,34.8 38.96,34.8 v35.51,31.34
N$1
  Top 0.203: U1.12 59.19,26.58 58.27,25.65 57.05,25.65 56.44,25.04 56.44,24.02 Q1.1 56.44,23.98 56.44,22.4 55.07,21.03 C17.1
N$2
  Top 0.203: U1.22 U1.21
  Top 0.254: U1.22 64.19,26.73 L1.2 64.86,24.59 C8.1 C9.1
N$3
  Top 0.203: C18.1 58.74,20.28 Q1.3 59.69,21.23 U1.13
N$4
  Top 0.254: U$23.1 13.65,20.12 U$24.3 15.44,21.71 R36.1 17.74,18.36 R35.2
N$6
  Top 0.254: C11.1 66.9,45.06 66.4,44.55 66.4,42.52 66.6,42.32 67.68,42.32 U1.49
N$7
  Top 0.203: 54.41,47.2 C10.1 54.69,47.43 U1.73
N$8
  Top 0.203: C20.1 51.76,25.85 Q2.P$2 55.32,25.85 57.19,27.73 U1.8
N$9
  Top 0.203: U1.9 57.69,27.41 55.47,25.2 55.47,23.88 Q2.P$1 53.71,23 C19.1
N$10
  Top 0.254: R8.2 28.56,24 LED1.C
N$11
  Top 0.203: R1.1 18.4,44.28 U6.P$9
N$12
  Top 0.203: LED2.C 31.75,22.44 R9.2
N$17
  Top 0.61: C12.2 L2.1
N$18
  Top 0.254: L4.2 12.79,38.1 L3.2 13.48,36.03 U2.12
N$19
  Top 0.254: 7.82,35.2 7.62,35.2 ANT.FEED
  Top 0.61: 7.82,35.2 C12.1 C13.1
N$20
  Top 0.254: U2.13 13.12,35.53 L2.2 12.61,35.2 L3.1
N$21
  Top 0.203: U2.11 14.37,38.06 13.46,38.96 12.05,38.96 L4.1
  Top 0.254: L4.1 10.05,38.05 C21.1 C14.1
N$23
  Top 0.203: R16.2 14.88,33.25 U2.16
N$24
  Top 0.203: U2.19 16.77,33.06 C24.1
N$25
  Top 0.203: R34.1 11.84,20.19 U$23.2
N$26
  Top 0.203: U2.9 15.76,38.22 17.02,39.47 17.02,41.06 C22.1 16.6,41.06 Q3.1
N$27
  Top 0.203: U2.10 15.26,37.77 13.16,39.88 11.78,39.88 Q3.3 11.75,39.88 9.95,39.88 C23.1
N$28
  Top 0.203: 31.12,39.63 31.02,39.63 R15.2
  Top 0.254: U3.3 31.12,39.63
N$29
  Top 0.203: U3.7 32.39,29.07 R14.1
N$30
  Top 0.203: SJ1.2 23.37,24.59 23.77,24.18 25.82,24.18 R17.1
N$31
  Top 0.203: SJ2.2 23.37,23.37 23.77,23.77 24.79,23.77 25.86,22.71 R18.1
N$38
  Top 0.203: X2.2 10.6,23.91 11.33,24.64 11.33,27.69 11.94,28.3 12.58,28.3 U4.1
PH1LINE
  Top 0.61: SJ4.2 90.37,59.59 91.19,60.4 91.19,62.23 89.97,63.45 88.95,63.45 PWRHEAD1.16
  Top 1.778: PWRHEAD1.16 PWRHEAD1.15 PWRHEAD1.14 PWRHEAD1.13 PWRHEAD1.12 PWRHEAD1.11 PWRHEAD1.10 PWRHEAD1.9 PWRHEAD1.8 PWRHEAD1.7 PWRHEAD1.6 PWRHEAD1.5 PWRHEAD1.4 PWRHEAD1.3 PWRHEAD1.2 PWRHEAD1.1
PH3LINE
  Top 0.61: SJ3.2 89.56,15.9 90.58,14.88 90.58,11.84 PWRHEAD3.1
  Top 1.778: PWRHEAD3.1 PWRHEAD3.2 PWRHEAD3.3 PWRHEAD3.4 PWRHEAD3.5 PWRHEAD3.6 PWRHEAD3.7 PWRHEAD3.8 PWRHEAD3.9 PWRHEAD3.10 PWRHEAD3.11 PWRHEAD3.12 PWRHEAD3.13 PWRHEAD3.14 PWRHEAD3.15 PWRHEAD3.16
PH4LINE
  Top 1.778: BATTHEAD2.2 PWRHEAD4.1 PWRHEAD4.2 PWRHEAD4.3 PWRHEAD4.4 PWRHEAD4.5 PWRHEAD4.6 PWRHEAD4.7 PWRHEAD4.8 PWRHEAD4.9 PWRHEAD4.10 PWRHEAD4.11 PWRHEAD4.12 PWRHEAD4.13 PWRHEAD4.14 PWRHEAD4.15 PWRHEAD4.16
  pour Bottom (no thermals): 45.26,64.26 42.21,64.26 42.21,62.64 45.26,62.64
RF24_CE  (via drill 0.38)
  Top 0.203: U1.81 50.09,40.33 46.89,43.54 40.18,43.54 v39.78,43.94 | U2.1 18.16,33.65 v19.05,32.77
  Bottom 0.203: v19.05,32.77 18.03,33.78 18.03,38.66 20.47,41.1 25.15,41.1 28.6,44.55 39.17,44.55 v39.78,43.94
RF24_CS  (via drill 0.38)
  Top 0.203: U1.82 49.98,39.83 46.69,43.13 39.37,43.13 v38.76,43.74 | U2.2 18.81,35.03 19.05,34.8 v19.05,34.19
  Bottom 0.203: v19.05,34.19 18.44,34.8 18.44,38.46 20.68,40.69 25.35,40.69 28.4,43.74 v38.76,43.74
RF24_IRQ  (via drill 0.38)
  Top 0.203: U1.84 49.77,38.83 46.69,41.91 40.79,41.91 v39.78,40.89 | U2.6 17.22,37.48 18.68,37.48 v19.46,38.25
  Bottom 0.203: v39.78,40.89 38.35,39.47 20.68,39.47 v19.46,38.25
SA  (via drill 0.38)
  Top 0.203: U1.14 60.19,18.03 59.08,16.92 54.98,16.92 C45.1 R48.1 50.2,18.25 RSTSWITCH.3 49.48,18.39 48.31,19.56 45.26,19.56 v44.04,18.34 | U5.P$7 38.1,21.13 37.54,20.57 36.52,20.57 33.02,17.07 PINHEAD1.6
  Bottom 0.203: v44.04,18.34 42.22,18.34 39.17,15.29 34.34,15.29 33.02,13.97 PINHEAD1.6
SDIO_CK  (via drill 0.38)
  Top 0.203: R4.1 18.43,49.14 U6.P$5 17.66,49.23 17.61,49.17 v15.85,49.17 | U1.80 50.2,40.83 47.09,43.94 41,43.94 38.35,46.58 v36.32,46.58
  Bottom 0.203: v36.32,46.58 35.46,45.72 19.3,45.72 v15.85,49.17
SDIO_CMD  (via drill 0.38)
  Top 0.203: U1.83 49.88,39.33 46.48,42.72 38.56,42.72 v34.7,46.58 | U6.P$3 17.83,51.26 | U6.P$3 17.67,51.41 v15.85,51.41 | R5.1 18.42,51.34 U6.P$3
  Bottom 0.203: v34.7,46.58 20.68,46.58 v15.85,51.41
SDIO_D0  (via drill 0.38)
  Top 0.203: U1.65 58.69,47.38 52.78,53.29 v52.17,53.29 | R3.1 19.36,46.94 U6.P$7 v15.85,46.94
  Bottom 0.203: v52.17,53.29 52.17,52.27 44.81,44.91 16.46,44.91 15.65,45.72 15.65,46.74 v15.85,46.94
SDIO_D1  (via drill 0.38)
  Top 0.203: U1.66 58.19,47.27 52.98,52.48 51.56,52.48 v50.75,53.29 | R2.1 19.19,45.84 U6.P$8 17.66,45.92 v16.46,45.92
  Bottom 0.203: v50.75,53.29 50.75,51.46 44.6,45.31 17.07,45.31 v16.46,45.92
SDIO_D2  (via drill 0.38)
  Top 0.203: R7.1 18.65,53.54 U6.P$1 17.64,53.44 v15.85,53.44 | v35.51,47.4 38.15,47.4 40.34,45.21 50.7,45.21 52.83,43.08 52.83,42.06 52.6,41.83 U1.78
  Bottom 0.203: v35.51,47.4 21.9,47.4 v15.85,53.44
SDIO_D3  (via drill 0.38)
  Top 0.203: v31.65,34.39 32.46,33.58 37.95,33.58 39.62,31.9 40.03,31.9 v40.64,31.29 | R6.1 18.48,52.44 U6.P$2 17.71,52.48 17.66,52.43 v15.85,52.43 | U1.79 50.72,41.33 v50.39,41.66
  Bottom 0.203: v31.65,34.39 31.65,33.17 30.23,31.75 19.05,31.75 15.19,35.61 15.19,51.77 v15.85,52.43 | v50.39,41.66 40.64,31.9 v40.64,31.29
SDIO_DETECT  (via drill 0.38)
  Top 0.203: v54.81,37.24 56.03,38.46 62.13,38.46 65.19,41.52 U1.52 | v39.37,37.74 39.27,37.64 45.47,37.64 v46.69,36.42 | R1.2 20.73,42.27 v20.68,42.32 | v23.52,42.32 v28.4,37.44
  Bottom 0.203: v54.81,37.24 54.2,36.63 46.89,36.63 v46.69,36.42 | v28.4,37.44 39.07,37.44 v39.37,37.74 | v20.68,42.32 v23.52,42.32
SPI_MISO  (via drill 0.38)
  Top 0.203: U1.88 49.33,36.83 46.79,39.37 43.74,39.37 43.23,39.88 41.81,39.88 v41,39.07 | v32.36,35.61 32.36,37.41 U3.2 | 21.08,36.42 21.03,36.47 R11.1 20.93,36.53 19.75,36.53 v19.25,37.03 18.75,36.53 U2.5
  Bottom 0.203: v41,39.07 41,37.64 39.78,36.42 33.17,36.42 v32.36,35.61 31.65,35.61 30.84,34.8 30.84,32.97 30.02,32.16 21.08,32.16 19.86,33.38 19.86,34.59 19.25,35.2 v19.25,37.03
SPI_MOSI  (via drill 0.38)
  Top 0.203: U1.57 62.69,48.26 58.47,52.48 v58.47,53.29 | v29.82,33.17 29.82,31.16 U3.5 | U2.4 19.85,36.03 v20.07,35.81 20.47,35.41 20.89,35.41 R13.2
  Bottom 0.203: v58.47,53.29 57.66,52.48 55.02,52.48 44.25,41.71 42.62,41.71 40.18,39.27 40.18,37.44 39.57,36.83 32.26,36.83 30.28,34.85 30.28,33.63 v29.82,33.17 20.68,33.17 20.27,33.58 20.27,35.61 v20.07,35.81
SPI_SCK  (via drill 0.38)
  Top 0.203: U1.85 49.66,38.33 46.48,41.5 41.4,41.5 v40.79,40.89 | v28.6,33.98 30.23,33.98 31.12,33.1 U3.6 31.12,27.75 30.91,27.75 R12.2 | U2.3 18.92,35.53 20.47,33.98 v21.08,33.98
  Bottom 0.203: v40.79,40.89 38.96,39.07 21.95,39.07 21.08,38.2 v21.08,33.98 v28.6,33.98
T0
  Top 0.203: PINHEAD3.1 8.89,57.15 20.47,57.15 36.52,41.1 36.52,36.22 39.98,32.77 50.55,32.77 50.61,32.83 U1.96
T1
  Top 0.203: PINHEAD3.2 11.02,57.56 20.68,57.56 36.93,41.3 36.93,36.42 40.18,33.17 50.34,33.17 50.5,33.33 U1.95
T2
  Top 0.203: PINHEAD3.3 13.16,57.96 20.88,57.96 37.34,41.5 37.34,36.63 40.39,33.58 48.31,33.58 49.33,34.59 50.34,34.59 50.61,34.33 U1.93
T3
  Top 0.203: PINHEAD3.4 15.29,58.37 21.08,58.37 37.74,41.71 37.74,36.83 40.59,33.98 48.11,33.98 49.12,35 50.55,35 50.72,34.83 U1.92 51.66,34.8
T4
  Top 0.203: PINHEAD3.5 17.42,58.78 21.28,58.78 38.15,41.91 38.15,37.03 40.79,34.39 47.9,34.39 48.92,35.41 50.75,35.41 50.83,35.33 U1.91
T5
  Top 0.203: U1.64 59.19,47.49 51.56,55.12 25.55,55.12 21.49,59.18 19.56,59.18 PINHEAD3.6
T6
  Top 0.203: U1.63 59.69,47.6 51.77,55.52 25.76,55.52 PINHEAD3.7
T7
  Top 0.203: U1.62 60.19,47.71 51.97,55.93 27.89,55.93 PINHEAD3.8
T8
  Top 0.203: U1.61 60.69,47.82 52.17,56.34 30.02,56.34 PINHEAD3.9
T9
  Top 0.203: U1.60 61.19,47.93 52.38,56.74 32.16,56.74 PINHEAD3.10
T10
  Top 0.203: U1.59 61.69,48.04 52.58,57.15 34.29,57.15 PINHEAD3.11
T11
  Top 0.203: PINHEAD3.12 36.42,57.56 52.78,57.56 56.24,54.1 58.67,54.1 61.11,51.66 61.11,50.44 64.19,47.37 U1.54
T12
  Top 0.203: PINHEAD3.13 38.56,57.96 52.98,57.96 56.44,54.51 58.88,54.51 61.52,51.87 61.52,50.65 64.69,47.48 U1.53
T13  (via drill 0.38)
  Top 0.203: PINHEAD3.14 40.69,58.37 53.19,58.37 56.64,54.91 59.08,54.91 62.33,51.66 v62.33,51.05 | U1.47 66.83,41.33 66.19,40.69 66.19,40.28 v65.38,39.47
  Bottom 0.203: v65.38,39.47 62.94,41.91 62.94,50.44 v62.33,51.05
T14  (via drill 0.38)
  Top 0.203: PINHEAD3.15 42.82,58.78 53.39,58.78 56.84,55.32 59.28,55.32 63.35,51.26 v63.35,51.05
  Top 0.254: U1.48 66.52,41.83 v65.38,40.69
  Bottom 0.203: v65.38,40.69 64.77,40.69 63.35,42.11 v63.35,51.05
TA0
  Top 0.203: U1.36 69.43,35.83 73.1,32.16 73.1,19.61 78.74,13.97 PINHEAD2.5
TA1
  Top 0.203: U1.35 69.32,35.33 72.7,31.95 72.7,17.48 76.2,13.97 PINHEAD2.6
TA2
  Top 0.203: U1.32 70.21,33.83 72.29,31.75 72.29,15.34 73.66,13.97 PINHEAD2.7
TA3
  Top 0.203: U1.31 70.1,33.33 71.88,31.55 71.88,13.36 71.22,12.7 PINHEAD2.8
TA4
  Top 0.203: U1.26 67.21,30.35 67.21,20.17 68.58,18.8 PINHEAD2.9
TA5
  Top 0.203: PINHEAD2.10 66.04,19.41 66.8,20.17 66.8,26.87 65.69,27.98 U1.25
TA6
  Top 0.203: U1.24 65.19,27.88 66.4,26.67 66.4,20.57 63.5,17.68 PINHEAD2.11
TA7
  Top 0.203: PINHEAD2.12 60.96,15.75 65.99,20.78 65.99,26.47 64.69,27.77 U1.23
TA8
  Top 0.203: U1.18 62.19,17.54 58.42,13.77 PINHEAD2.13
TA9
  Top 0.203: U1.17 61.69,17.7 59.69,15.7 57.61,15.7 55.88,13.97 PINHEAD2.14
TA10
  Top 0.203: U1.16 61.19,17.81 59.49,16.1 55.47,16.1 53.34,13.97 PINHEAD2.15
TA11
  Top 0.203: U1.15 60.69,17.92 59.28,16.51 53.34,16.51 50.8,13.97 PINHEAD2.16
USB_DISC  (via drill 0.38)
  Top 0.203: PINHEAD2.4 81.28,15.65 v78.59,18.34 | v60.1,32.56 59.28,31.75 v58.47,31.75 | v57.66,30.33 57.14,30.33 56.69,29.87 U1.7 56.69,27.94 56.44,27.69 v52.98,27.69 | 20.88,27.89 v20.88,29.11 | 20.88,27.89 20.79,27.89 | v46.89,27.69 46.89,30.53 45.06,32.36 39.78,32.36 37.74,34.39 v33.07,34.39 | 20.88,27.89 20.89,27.89 R37.1
  Top 0.406: R37.1 16.91,23.91 U$24.1
  Bottom 0.203: v78.59,18.34 65.79,31.14 63.35,31.14 61.92,32.56 v60.1,32.56 | v58.47,31.75 58.47,31.14 v57.66,30.33 | v33.07,34.39 33.07,33.38 28.8,29.11 v20.88,29.11 | v46.89,27.69 v52.98,27.69
USB_DM  (via drill 0.38)
  Top 0.203: v57.05,42.93 56.19,43.78 U1.70 | v57.45,36.63 62.53,36.63 v64.36,34.8 | v68.43,27.28 68.43,29.11 v69.24,29.92 | v22.3,17.93 22.5,17.73 30.02,17.73 32.66,20.37 32.66,21.59 v33.07,22 | v79.81,19.35 81.08,19.35 86.36,14.07 PINHEAD2.2
  Top 0.254: U4.6 16.93,28.38 v18.24,27.08
  Bottom 0.203: v68.43,27.28 67.82,26.67 38.56,26.67 33.88,22 v33.07,22 | v69.24,29.92 v79.81,19.35 | v69.24,29.92 69.04,30.12 | v22.3,17.93 21.69,18.54 21.69,23.62 v18.24,27.08 | v69.24,29.92 v64.36,34.8 | v57.45,36.63 57.45,42.52 v57.05,42.93
USB_DP  (via drill 0.38)
  Top 0.203: v56.84,35.81 61.92,35.81 v63.75,33.98 | v55.63,42.93 55.69,42.99 U1.71 | v17.22,26.26 17,26.48 U4.4 15.26,26.47 14.58,26.47 11.84,23.72 R34.2 | 83.82,12.85 PINHEAD2.3 83.82,14.12 v80.01,17.93 | v21.69,17.12 30.02,17.12 33.48,20.57 v33.48,20.98
  Top 0.254: v69.24,26.47 v69.24,28.7
  Bottom 0.203: v17.22,26.26 21.28,22.2 21.28,17.93 21.69,17.53 v21.69,17.12 | v69.24,26.47 69.04,26.26 38.96,26.26 33.68,20.98 v33.48,20.98 | v80.01,17.93 v69.24,28.7 63.96,33.98 v63.75,33.98 | v55.63,42.93 56.64,41.91 56.64,36.02
  Bottom 0.254: v56.84,35.81 56.64,36.02
USBP3
  Top 0.203: X2.3 10.41,23.11 12.34,25.04 12.34,26.16 U4.3
  Top 0.254: U4.3 12.65,26.47
V+  (via drill 0.38)
  Top 0.61: 91.24,55.27 91.26,55.3 SJ4.1
  Top 1.016: IC2.3 84.65,34.29 C32.+ 76.19,32.19 IC1.3 | v88.54,49.02 89.98,50.45 C28.1 90.13,50.89 C31.2 90.13,54.17 91.24,55.27 | v57.86,57.76 v64.62,57.76
  Bottom 1.016: IC2.3 88.04,34.29 80.95,41.38 | v57.86,57.76 48.31,57.76 46.08,60 46.08,61.42 46.89,62.23 46.89,63.25 | 80.95,41.38 64.62,57.71 v64.62,57.76 | v88.54,49.02 88.54,48.97 80.95,41.38
  pour Bottom (no thermals): 49.12,64.26 46.08,64.26 46.08,62.64 49.12,62.64

## Text on the board
_tsilk: Unregulated | Unregulated / 5V | 5V | VIN | L1 | L2 | Reset | 5V | 3.3V | 5V | 5V / 3.3V
_bsilk: BATT | 64 | 63 | 62 | 61 | 60 | 59 | 58 | 57 | 56 | 55 | 54 | 53 | 52 | 51 | 50 | 49 | BATT | 48 | 47 | 46 | 45 | 44 | 43 | 42 | 41 | 40 | 39 | 38 | 37 | 36 | 35 | 34 | 33 | T0 | T1 | T2 | T3 | T4 | T5 | T6 | T7 | T8 | T9 | T10 | T11 | T12 | T13 | T14 | D0 | D1 | D2 | D3 | D4 | D5 | D6 | D7 | D8 | D9 | D10 | D11 | D12 | D13 | D14 | D15 | D16 | Pygmy HP Board v1 | Designed By Evan Teitelman and Warren D Greenway | CC-BY-SA | USB Disc | BOOT1 | BOOT0 | JTRST | DAC1 | MCO | JTDO | JTCK | JTMS | TA10 | DAC2 | RX3 | TX3 | RX2 | TX2 | RX1 | JTDI | TA11 | TA9 | TA8 | TA7 | TA6 | TA5 | TA4 | TA3 | TA2 | TA0 | TX1 | SA | TA1 | D+ | D- | 1 | 2 | 3 | 4 | 5 | 6 | 7 | 8 | 9 | 10 | 11 | 12 | 13 | 14 | 15 | 16 | 17 | 18 | 19 | 20 | 21 | 22 | 23 | 24 | 25 | 26 | 27 | 28 | 29 | 30 | 31 | 32